# Allegro board f1c200s.brd
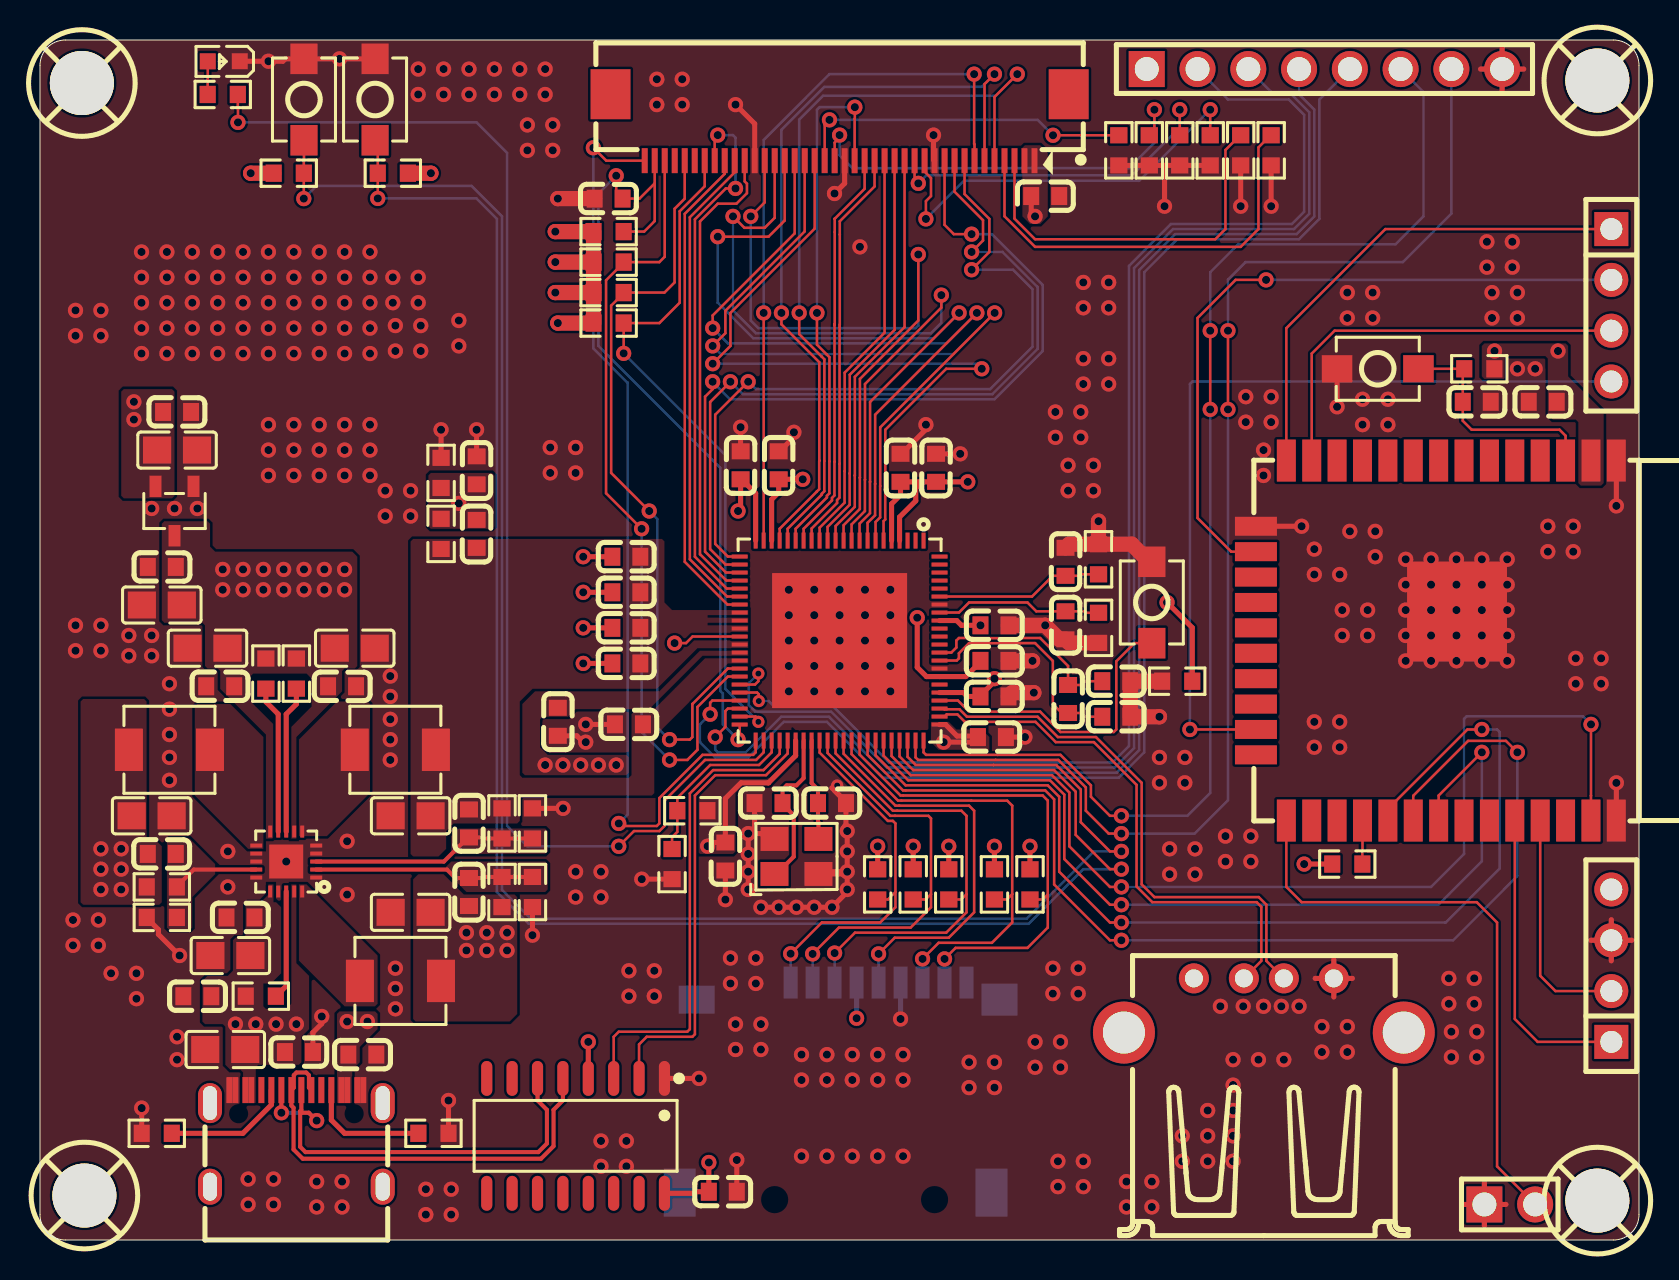
[diagram p0: board, top side]
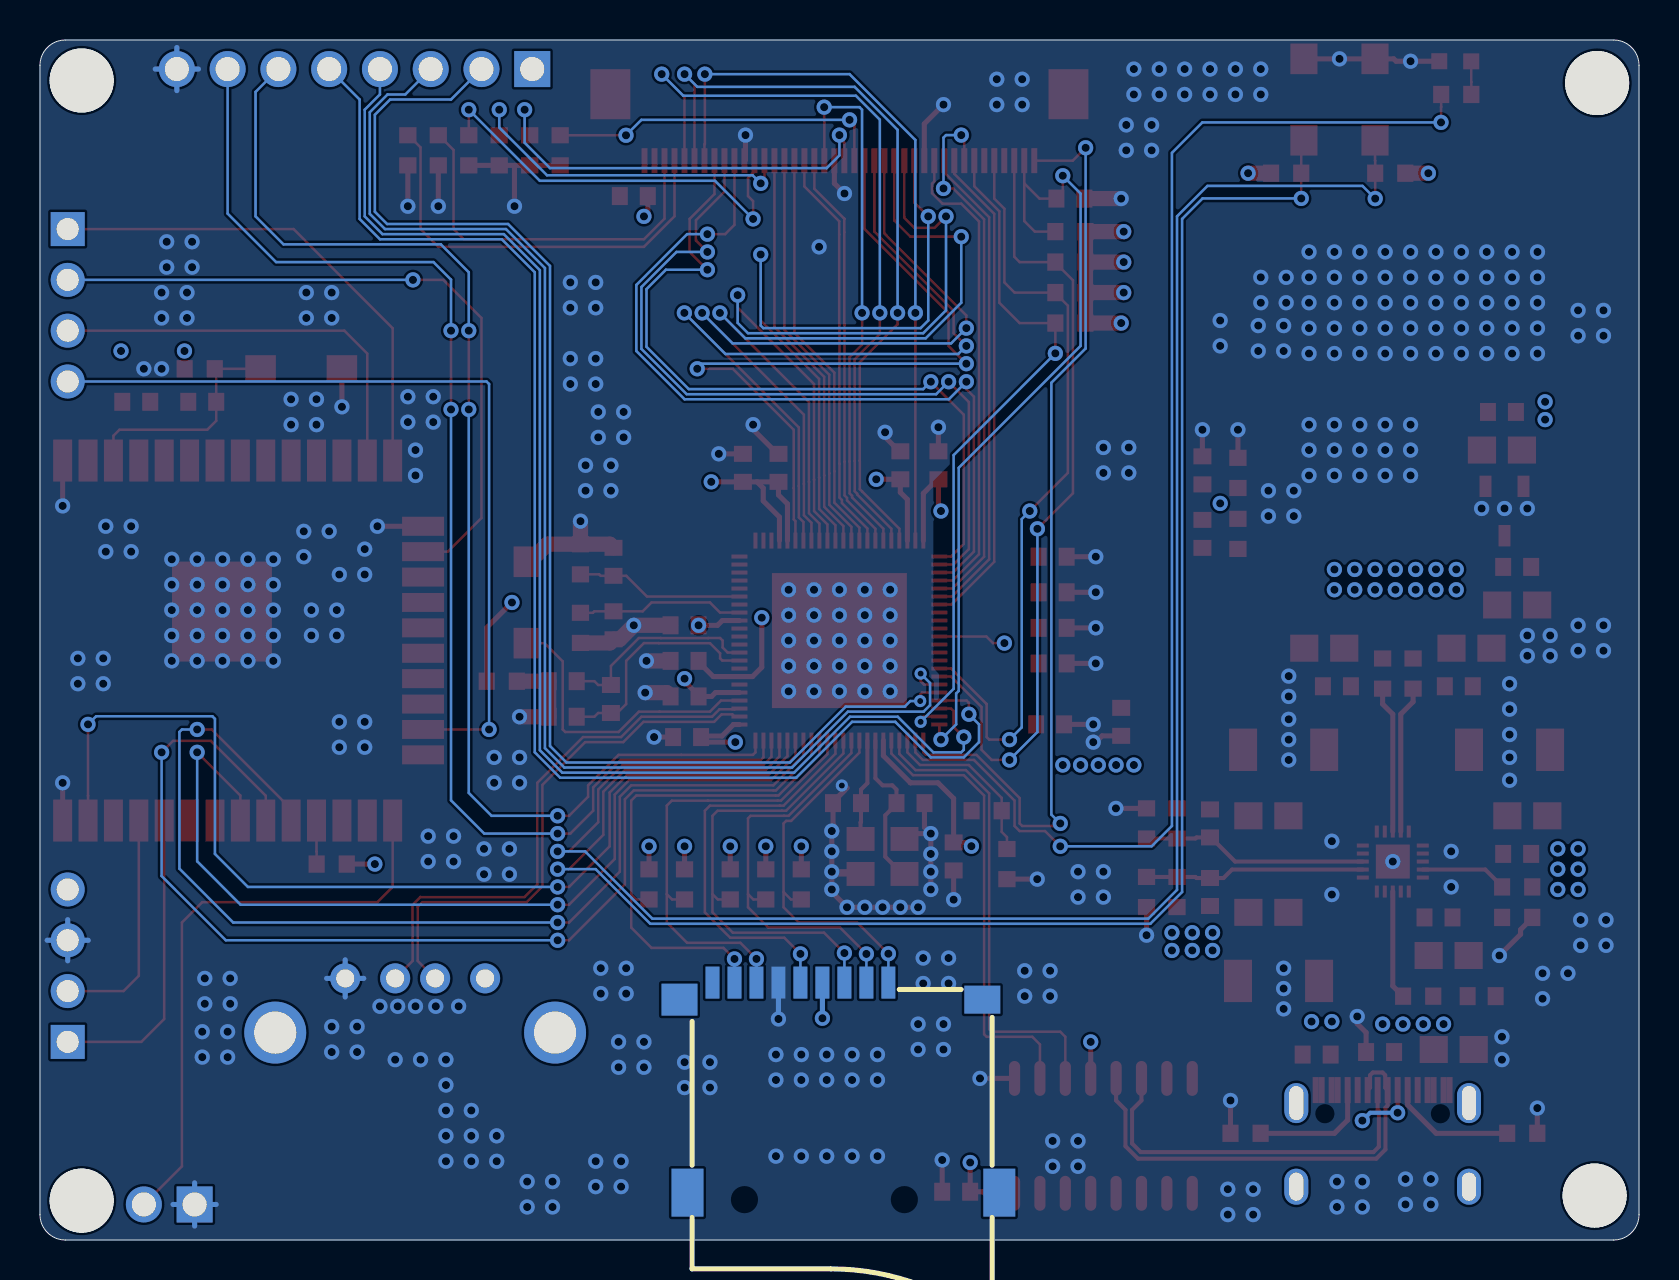
[diagram p1: board, bottom side, seen from below]

Outline 80 x 60 mm; copper layers: TOP, GND, POWER, BOTTOM. Coordinates in mm from the lower left corner of the outline.
Outline path: 0,58.73 0,1.27 arc(0.37,0.37) 1.27,0 78.73,0 arc(79.63,0.37) 80,1.27 80,58.73 arc(79.63,59.63) 78.73,60 1.27,60 arc(0.37,59.63) 0,58.73

## Design rules (mm)
constraint set DEFAULT: min track width 0.127
net group USB: nets USB_DN USB_DP

## Placement (name value [footprint] x y rotation side)
C1  104  [C0603]  7.87 12.19 180 top
C2  104  [C0603]  12.95 9.4 0 top
C27  22uF  [C0805]  6.1 31.75 180 top
C28  104  [C0603]  6.1 33.66 180 top
C29  22uF  [C0805]  6.86 39.5 0 top
C30  104  [C0603]  6.86 41.4 0 top
C31  104  [C0603]  34.16 2.41 0 top
C32  22uF  [C0805]  8.38 29.59 0 top
C33  104  [C0603]  9.02 27.69 0 top
C34  22uF  [C0805]  15.75 29.59 180 top
C35  104  [C0603]  15.11 27.69 180 top
C36  22uF  [C0805]  9.27 9.53 0 top
C37  104  [C0603]  16.13 9.27 180 top
C38  22uF  [C0805]  9.53 14.22 180 top
C39  104  [C0603]  10.03 16.13 0 top
C40  220pF  [C0603]  6.1 19.3 0 top
C41  22uF  [C0805]  5.59 21.21 0 top
C42  22uF  [C0805]  18.54 21.21 180 top
C43  220pF  [C0603]  21.46 20.83 270 top
C44  22uF  [C0805]  18.54 16.38 180 top
C45  220pF  [C0603]  21.46 17.4 90 top
C46  104  [C0603]  44.83 38.61 90 top
C47  104  [C0603]  36.96 38.73 90 top
C48  104  [C0603]  43.05 38.61 90 top
C49  104  [C0603]  35.05 38.73 90 top
C50  104  [C0603]  25.91 25.91 270 top
C51  104  [C0603]  29.46 25.78 0 top
C52  104  [C0603]  29.34 28.83 0 top
C53  104  [C0603]  29.34 30.61 0 top
C54  104  [C0603]  29.34 32.38 0 top
C55  104  [C0603]  29.34 34.16 0 top
C56  104  [C0603]  21.84 35.31 90 top
C57  104  [C0603]  21.84 38.48 90 top
C58  104  [C0603]  47.75 30.73 0 top
C59  1uF  [C0603]  51.31 33.91 270 top
C60  1uF  [C0603]  51.31 30.73 270 top
C61  104  [C0603]  34.29 19.18 270 top
C62  18pF  [C0603]  36.45 21.84 0 top
C63  18pF  [C0603]  39.62 21.84 0 top
C64  104  [C0603]  47.62 25.15 0 top
C65  104  [C0603]  47.75 27.18 0 top
C67  104  [C0603]  75.18 41.91 180 top
C68  104  [C0603]  71.88 41.91 180 top
C69  104  [C0603]  50.29 52.2 180 top
C70  104  [C0603]  28.45 52.07 0 top
C71  104  [C0603]  47.75 28.96 0 top
C72  10uF  [C0603]  53.85 26.16 0 top
C73  10uF  [C0603]  53.85 27.94 0 top
C74  10uF  [C0603]  51.44 27.05 270 top
D1  LED  [LED0603]  9.14 58.93 180 top
J1  4 HEADER  [TH_4P]  78.61 13.72 90 top
J2  B2S  [TH_2P]  73.53 1.78 270 top
J3  4 HEADER  [TH_4P]  78.61 46.74 270 top
J4  HEADER 40  [FPCSMD40P]  40.01 55.63 0 top
J5  8 HEADER  [TH_8P]  64.26 58.55 0 top
KEY1  KEY  [KEY_SMD_3X4X2]  16.76 57.02 270 top
KEY2  KEY  [KEY_SMD_3X4X2]  13.21 57.02 270 top
L1  2.2uH  [L0420]  6.48 24.51 180 top
L2  2.2uH  [L0420]  17.78 24.51 0 top
L3  2.2uH  [L0420]  18.03 12.95 0 top
M1  M  [M3]  2.16 57.78 0 top
M2  M  [M3]  2.29 2.16 0 top
M3  M  [M3]  77.98 1.91 0 top
M4  M  [M3]  77.98 57.91 0 top
R1  5.1k  [R0603]  19.68 5.33 180 top
R2  5.1k  [R0603]  5.84 5.33 0 top
R3  100k  [R0603]  12.83 28.32 90 top
R4  68k  [R0603]  6.1 17.65 180 top
R5  15k  [R0603]  6.1 16.13 180 top
R6  150K  [R0603]  23.11 20.83 90 top
R7  100k  [R0603]  24.64 20.83 90 top
R8  100k  [R0603]  23.11 17.4 270 top
R9  100k  [R0603]  24.64 17.4 270 top
R10  10k  [R0603]  55.5 54.48 90 top
R11  2k  [R0603]  20.07 35.31 270 top
R12  2k  [R0603]  20.07 38.35 270 top
R13  200k  [R0603]  52.96 34.04 90 top
R14  200k  [R0603]  52.96 30.61 90 top
R15  47k  [R0603]  56.9 27.94 180 top
R16  10k  [R0603]  72.01 43.56 180 top
R17  10k  [R0603]  65.41 18.8 0 top
R18  10k  [R0603]  28.45 45.85 0 top
R19  10k  [R0603]  28.45 50.42 180 top
R20  10k  [R0603]  28.45 48.9 180 top
R21  10k  [R0603]  28.45 47.37 180 top
R22  10k  [R0603]  41.91 17.78 270 top
R23  10k  [R0603]  43.69 17.78 270 top
R24  10k  [R0603]  45.47 17.78 270 top
R25  10k  [R0603]  47.75 17.78 270 top
R26  10k  [R0603]  49.53 17.78 270 top
R29  10k  [R0603]  17.65 53.34 0 top
R30  10k  [R0603]  12.45 53.34 180 top
R31  10k  [R0603]  9.14 57.28 0 top
R32  100k  [R0603]  11.3 28.32 90 top
R33  100k  [R0603]  11.05 12.19 180 top
R34  10k  [R0603]  53.98 54.48 90 top
R35  10k  [R0603]  58.55 54.48 90 top
R36  10k  [R0603]  57.02 54.48 90 top
R37  10k  [R0603]  60.07 54.48 90 top
R38  10k  [R0603]  61.59 54.48 90 top
R39  47k  [R0603]  32.64 21.46 180 top
R40  47k  [R0603]  31.62 18.8 90 top
RES  KEY  [KEY_SMD_3X4X2]  55.63 31.88 90 top
U4  XC6206  [SOT-23]  6.73 36.45 90 top
U5  CH340C  [SOP-16]  26.8 5.21 180 top
U6  F1C200S  [QFN-88]  40.01 29.97 180 top
U7  EA3036  [WQFN-20-EP]  12.32 18.92 180 top
U9  ESP32-WROOM-32E  [ESP32-WROOM]  69.85 29.97 180 top
U10  MiniSD  [MINISD]  40.01 7.62 270 bottom
U11  Type_C_16P  [USBSMDC]  12.7 5.08 0 top
USB2  Type_A_4P  [USBTHA]  61.21 7.62 0 top
WIFI EN  KEY  [KEY_SMD_3X4X2]  66.93 43.56 0 top
Y2  24MHZ  [SMD3225]  37.85 19.18 0 top

## Library data of the parts
C1 C2 C27-C65 C67-C74 = CAP NP: Tolerance: .TOL; User Part Number: .PARTNO
D1 = LED: Tolerance: .TOL; User Part Number: .PARTNO
J1 J3 = 4 HEADER: Tolerance: .TOL; User Part Number: .PARTNO
J2 = B2S: Tolerance: .TOL; User Part Number: .PARTNO
J4 = HEADER 40_0: Tolerance: .TOL; User Part Number: .PARTNO
J5 = 8 HEADER: Tolerance: .TOL; User Part Number: .PARTNO
KEY1 KEY2 RES WIFI EN = SW KEY-SPST: Tolerance: .TOL; User Part Number: .PARTNO
L1-L3 = INDUCTOR: Tolerance: .TOL; User Part Number: .PARTNO
M1-M4 = M: Tolerance: .TOL; User Part Number: .PARTNO
R1-R26 R29-R40 = R: Tolerance: .TOL; User Part Number: .PARTNO
U4 = XC6206: Tolerance: .TOL; User Part Number: .PARTNO
U5 = CH340C: Tolerance: .TOL; User Part Number: .PARTNO
U6 = F1C200S: Tolerance: .TOL; User Part Number: .PARTNO
U7 = EA3036: Tolerance: .TOL; User Part Number: .PARTNO
U9 = ESP32-WROOM-32E: Tolerance: .TOL; User Part Number: .PARTNO
U10 = MiniSD: Tolerance: .TOL; User Part Number: .PARTNO
U11 = Type_C_16P: Tolerance: .TOL; User Part Number: .PARTNO
USB2 = Type_A_4P: Tolerance: .TOL; User Part Number: .PARTNO
Y2 = CRYSTAL1-4/SM_0: Tolerance: .TOL; User Part Number: .PARTNO

## Footprints (pads in the part's own frame, mm; a bottom-side part is the same pattern mirrored in y, then rotated)
C0603
  rect 0.8x0.899 smd: 1(-0.7,0) 2(0.7,0)
C0805
  rect 1.41x1.351 smd: 1(-1,0) 2(1,0)
ESP32-WROOM
  rect 0.95x2.101 smd: 1(-9.015,-9) 2(-7.745,-9) 3(-6.475,-9) 4(-5.205,-9) 5(-3.935,-9) 6(-2.665,-9) 7(-1.395,-9) 8(-0.125,-9) 9(1.145,-9) 10(2.415,-9) 11(3.685,-9) 12(4.955,-9) 13(6.225,-9) 14(7.495,-9) 25(7.495,9) 26(6.225,9) 27(4.955,9) 28(3.685,9) 29(2.415,9) 30(1.145,9) 31(-0.125,9) 32(-1.395,9) 33(-2.665,9) 34(-3.935,9) 35(-5.205,9) 36(-6.475,9) 37(-7.745,9) 38(-9.015,9)
  rect 2.101x0.95 smd: 15(9.015,-5.715) 16(9.015,-4.445) 17(9.015,-3.175) 18(9.015,-1.905) 19(9.015,-0.635) 20(9.015,0.635) 21(9.015,1.905) 22(9.015,3.175) 23(9.015,4.445) 24(9.015,5.715)
  rect 4.999x4.999 smd: 39(-1.045,-1.45)
FPCSMD40P
  rect 0.3x1.25 smd: 1(9.75,-1.662) 2(9.25,-1.662) 3(8.75,-1.662) 4(8.25,-1.662) 5(7.751,-1.662) 6(7.251,-1.662) 7(6.751,-1.662) 8(6.251,-1.662) 9(5.751,-1.662) 10(5.251,-1.662) 11(4.751,-1.663) 12(4.251,-1.662) 13(3.751,-1.662) 14(3.251,-1.663) 15(2.751,-1.663) 16(2.251,-1.662) 17(1.752,-1.662) 18(1.252,-1.662) 19(0.752,-1.662) 20(0.252,-1.662) 21(-0.248,-1.662) 22(-0.748,-1.659) 23(-1.248,-1.659) 24(-1.748,-1.659) 25(-2.248,-1.66) 26(-2.748,-1.66) 27(-3.248,-1.659) 28(-3.748,-1.659) 29(-4.248,-1.659) 30(-4.748,-1.659) 31(-5.249,-1.659) 32(-5.749,-1.659) 33(-6.249,-1.659) 34(-6.749,-1.659) 35(-7.249,-1.659) 36(-7.749,-1.659) 37(-8.249,-1.659) 38(-8.75,-1.659) 39(-9.25,-1.659) 40(-9.75,-1.659)
  rect 1.999x2.499 smd: 41(-11.46,1.663) 42(11.46,1.663)
KEY_SMD_3X4X2
  rect 1.529x1.359 smd: 1(-2.035,0) 2(2.035,0)
L0420
  rect 1.4x2.12 smd: 1(2.028,0) 2(-2.028,0)
LED0603
  rect 0.8x0.8 smd: 1(-0.851,-0.01) 2(0.749,-0.005)
M3
  round 3.2 hole 3.2: 1(-0.064,0.064)
MINISD
  rect 1.6x0.701 smd: 1(-5.251,2.45) 2(-5.251,1.35) 3(-5.251,0.25) 4(-5.251,-0.85) 5(-5.251,-1.95) 6(-5.251,-3.05) 7(-5.251,-4.15) 8(-5.251,-5.25) 9(-5.251,-6.35)
  rect 1.6x1.801 smd: 10(-4.399,-8)
  rect 2.4x1.6 smd: 11(5.251,-7.6) 12(5.251,8)
  rect 1.399x1.801 smd: 13(-4.398,7.15)
QFN-88
  rect 0.201x0.8 smd: 1(-4.2,-5) 2(-3.8,-5) 3(-3.4,-5) 4(-3,-5) 5(-2.6,-5) 6(-2.2,-5) 7(-1.8,-5) 8(-1.4,-5) 9(-1,-5) 10(-0.6,-5) 11(-0.2,-5) 12(0.2,-5) 13(0.6,-5) 14(1,-5) 15(1.4,-5) 16(1.8,-5) 17(2.2,-5) 18(2.6,-5) 19(3,-5) 20(3.4,-5) 21(3.8,-5) 22(4.2,-5) 45(4.2,5) 46(3.8,5) 47(3.4,5) 48(3,5) 49(2.6,5) 50(2.2,5) 51(1.8,5) 52(1.4,5) 53(1,5) 54(0.6,5) 55(0.2,5) 56(-0.2,5) 57(-0.6,5) 58(-1,5) 59(-1.4,5) 60(-1.8,5) 61(-2.2,5) 62(-2.6,5) 63(-3,5) 64(-3.4,5) 65(-3.8,5) 66(-4.2,5)
  rect 0.8x0.201 smd: 23(5,-4.2) 24(5,-3.8) 25(5,-3.4) 26(5,-3) 27(5,-2.6) 28(5,-2.2) 29(5,-1.8) 30(5,-1.4) 31(5,-1) 32(5,-0.6) 33(5,-0.2) 34(5,0.2) 35(5,0.6) 36(5,1) 37(5,1.4) 38(5,1.8) 39(5,2.2) 40(5,2.6) 41(5,3) 42(5,3.4) 43(5,3.8) 44(5,4.2) 67(-5,4.2) 68(-5,3.8) 69(-5,3.4) 70(-5,3) 71(-5,2.6) 72(-5,2.2) 73(-5,1.8) 74(-5,1.4) 75(-5,1) 76(-5,0.6) 77(-5,0.2) 78(-5,-0.2) 79(-5,-0.6) 80(-5,-1) 81(-5,-1.4) 82(-5,-1.8) 83(-5,-2.2) 84(-5,-2.6) 85(-5,-3) 86(-5,-3.4) 87(-5,-3.8) 88(-5,-4.2)
  rect 6.751x6.751 smd: 89(0,0)
R0603
  rect 0.808x0.864 smd: 1(-0.753,0) 2(0.753,0)
SMD3225
  rect 1.399x1.199 smd: 1(-1.1,-0.875) 2(1.1,-0.875) 3(1.1,0.875) 4(-1.1,0.875)
SOP-16
  oval 0.559x1.745 smd: 1(-4.445,-2.872) 2(-3.175,-2.872) 3(-1.905,-2.872) 4(-0.635,-2.872) 5(0.635,-2.872) 6(1.905,-2.872) 7(3.175,-2.872) 8(4.445,-2.872) 9(4.445,2.872) 10(3.175,2.872) 11(1.905,2.872) 12(0.635,2.872) 13(-0.635,2.872) 14(-1.905,2.872) 15(-3.175,2.872) 16(-4.445,2.872)
SOT-23
  rect 1.069x0.599 smd: 1(1.235,-0.95) 2(1.235,0.95) 3(-1.235,0)
TH_2P
  rect 1.801x1.801 hole 1.199: 1(0,-1.27)
  round 1.801 hole 1.199: 2(0,1.27)
TH_4P
  rect 1.699x1.699 hole 1.1: 1(-3.81,0)
  round 1.699 hole 1.1: 2(-1.27,0) 3(1.27,0) 4(3.81,0)
TH_8P
  rect 1.801x1.801 hole 1.199: 1(-8.89,0)
  round 1.801 hole 1.199: 2(-6.35,0) 3(-3.81,0) 4(-1.27,0) 5(1.27,0) 6(3.81,0) 7(6.35,0) 8(8.89,0)
USBSMDC
  oval 1.199x1.999 hole 0.701x1.699: 1(-4.193,1.765) 2(4.447,1.765)
  oval 1.199x1.801 hole 0.701x1.399: 3(-4.193,-2.415) 4(4.447,-2.415)
  rect 0.3x1.301 smd: A1(-3.223,2.415) A4(-2.423,2.415) A5(-1.123,2.415) A6(-0.123,2.415) A7(0.377,2.415) A8(1.377,2.415) A9(2.677,2.415) A12(3.477,2.415) B1(3.177,2.415) B4(2.377,2.415) B5(1.877,2.415) B6(0.877,2.415) B7(-0.623,2.415) B8(-1.623,2.415) B9(-2.123,2.415) B12(-2.923,2.415)
USBTHA
  round 1.501 hole 0.899: 1(-3.484,5.461) 2(-0.984,5.461) 3(1.016,5.461) 4(3.516,5.461)
  round 3.099 hole 2.101: SH1(7.016,2.751) SH2(-6.984,2.751)
WQFN-20-EP
  rect 0.599x0.201 smd: 1(-1.5,0.8) 2(-1.5,0.4) 3(-1.5,0) 4(-1.5,-0.4) 5(-1.5,-0.8) 11(1.5,-0.8) 12(1.5,-0.4) 13(1.5,0) 14(1.5,0.4) 15(1.5,0.8)
  rect 0.201x0.599 smd: 6(-0.8,-1.5) 7(-0.4,-1.5) 8(0,-1.5) 9(0.4,-1.5) 10(0.8,-1.5) 16(0.8,1.5) 17(0.4,1.5) 18(0,1.5) 19(-0.4,1.5) 20(-0.8,1.5)
  rect 1.699x1.699 smd: 21(0,0)

## Nets
GND: C1.2 C2.2 C27.2 C28.2 C29.2 C30.2 C31.2 C32.1 C33.1 C34.1 C35.1 C36.1 C37.1 C38.2 C39.1 C41.2 C42.2 C44.2 C46.2 C47.2 C48.2 C49.2 C50.2 C51.1 C52.1 C53.1 C54.1 C55.1 C57.2 C58.2 C59.1 C60.2 C61.2 C62.1 C63.2 C64.2 C65.2 C67.2 C68.1 C69.1 C70.1 C71.2 C72.2 C73.2 D1.1(CATHODE) J1.3 J2.1 J4.11 J4.20 J4.29 J5.8 KEY1.1 KEY2.1 R1.1 R2.1 R5.2 R7.2 R9.2 R10.1 R12.1 R13.2 R14.1 R15.2 R34.1 R35.1 R36.1 R37.1 R38.1 R40.1 RES.2 U4.1(VSS) U5.1 U6.74 U6.82 U6.89 U7.1 U7.4 U7.5 U7.12 U7.13 U7.15 U7.17 U7.21 U9.1 U9.15 U9.38 U9.39 U10.6 U11.A1 U11.A12 U11.B1 U11.B12 USB2.4 WIFI EN.1 Y2.2 Y2.4
VBUS: C1.1 C2.1 C27.1 C28.1 C32.2 C33.2 C34.2 C35.2 C36.2 C37.2 C38.1 C39.2 C69.2 J4.1 J4.2 R3.2 R32.2 R33.2 U4.3 U7.7 U7.10 U7.16 U7.19(VIN3) U11.A4 U11.A9 U11.B4 U11.B9(VBUS4) USB2.1(VCC)
VCC_1V2: C44.1 C45.1 C49.1 C50.1 C65.1 L3.1 R8.2 U6.22 U6.35 U6.71
VCC_2V5: C42.1 C43.1 C51.2 C52.2 C53.2 C54.2 C55.2 C56.1 L2.1 R6.2 R11.2 U6.30 U6.31 U6.32 U6.34 U6.36
VCC_2V8: C29.1 C30.1 C58.1 U4.2 U6.80
VCC_3V3: C31.1 C40.1 C41.1 C46.1 C47.1 C48.1 C61.1 C64.1 C67.1 C71.1 J1.4 J5.1 L1.1 R4.2 R15.1 R16.1 R17.1 R18.1 R19.2 R20.2 R21.2 R22.1 R23.1 R24.1 R25.1 R26.1 R29.2 R30.2 R39.1 U5.4 U5.16(VCC) U6.4 U6.5 U6.20 U6.50 U6.67 U6.73 U9.2 U10.4(VCC)
CT_INT: C70.2 J4.39 R19.1 U6.44
CT_SCL: J4.38 R20.1 U6.38
CT_SDA: J4.36 R21.1 U6.37
DEBUG_LED: R31.2 U6.46
KEY1: KEY1.2 R29.1 U6.63
KEY2: KEY2.2 R30.1 U6.64
LCD_BL: J4.34 R18.2 U6.43
LCD_CLK: J4.30 U6.26
LCD_D0: J4.21 R10.2
LCD_D1: J4.22 R34.2
LCD_D2: J4.23 U6.6
LCD_D3: J4.24 U6.7
LCD_D4: J4.25 U6.8
LCD_D5: J4.26 U6.9
LCD_D6: J4.27 U6.10
LCD_D7: J4.28 U6.11
LCD_D8: J4.12 R35.2
LCD_D9: J4.13 R36.2
LCD_D10: J4.14 U6.12
LCD_D11: J4.15 U6.13
LCD_D12: J4.16 U6.14
LCD_D13: J4.17 U6.15
LCD_D14: J4.18 U6.16
LCD_D15: J4.19 U6.17
LCD_D16: J4.3 R37.2
LCD_D17: J4.4 R38.2
LCD_D18: J4.5 U6.18
LCD_D19: J4.6 U6.19
LCD_D20: J4.7 U6.21
LCD_D21: J4.8 U6.23
LCD_D22: J4.9 U6.24
LCD_D23: J4.10 U6.25
LCD_DE: J4.33 U6.27
LCD_HSYNC: J4.31 U6.28
LCD_REST: J4.40 U6.45
LCD_VSYNC: J4.32 U6.29
SDIO_CLK: U6.56 U10.5
SDIO_CMD: R24.2 U6.55 U10.3
SDIO_D0: R25.2 U6.57 U10.7
SDIO_D1: R26.2 U6.58 U10.8
SDIO_D2: R22.2 U6.53 U10.1
SDIO_D3: R23.2 U6.54 U10.2
SOC_USB_DM: U6.68 USB2.2
SOC_USB_DP: U6.69 USB2.3
SPI0_CLK: U6.59 U9.30
SPI0_CS: U6.60 U9.29
SPI0_MISO: U6.61 U9.31
SPI0_MOSI: U6.62 U9.37
SPI1_CLK: J5.2 U6.40
SPI1_CS: J5.4 U6.42
SPI1_MISO: J5.3 U6.39
SPI1_MOSI: J5.5 U6.41
TCK: J3.2 U9.16
TDI: J3.1 U9.14
TDO: J3.4 U9.23
TMS: J3.3 U9.13
UART1_RX: J5.7 U6.65
UART1_TX: J5.6 U6.66
USB_DN: U5.6 U11.A7 U11.B7
USB_DP: U5.5 U11.A6 U11.B6
USB_RXD: U5.3 U6.48
USB_TXD: U5.2 U6.49
WIFI_EN: C68.2 R16.2 U9.3 WIFI EN.2
N89821: C40.2 R4.1 R5.1 U7.14
N90879: C43.2 R6.1 R7.1 U7.3
N91416: C45.2 R8.1 R9.1 U7.2
N96693: C56.2 C57.1 R11.1 R12.2 U6.33
N99176: C60.1 R14.2 U6.81
N99180: C59.2 R13.1 U6.83(VRA2)
N102537: R39.2 R40.2 U6.47
N104315: C62.2 U6.51 Y2.1
N104352: C63.1 U6.52 Y2.3(4)
N107401: J1.2 U9.35(TXD0)
N107405: J1.1 U9.34
N125505: C72.1 C74.2 U6.75
N125515: C73.1 C74.1 U6.76
N192994: R1.2 U11.B5
N192998: R2.2 U11.A5
N861690: R3.1 U7.8
N871675: L1.2 U7.11
N1057780: RES.1 U6.70
N1197170: D1.2 R31.1
N8716712: R33.1 U7.18
N8716714: L3.2 U7.20
N8716716: L2.2 U7.6
N8716719: R32.1 U7.9
N10697224: J2.2 U9.25
N10697227: R17.2 U9.28

Pads without a net: J4 35 37 41 42; M1 1; M2 1; M3 1; M4 1; U5 7 8 9 10 11 12 13 14 15; U6 1 2 3 72 77 78 79 84 85 86 87 88; U9 4 5 6 7 8 9 10 11 12 17 18 19 20 21 22 24 26 27 32 33 36; U10 9 10 11 12 13; U11 1 2 3 4 A8 B8; USB2 SH1 SH2

## Via types
v1: diameter 0.762, hole 0.406, TOP to BOTTOM, 566 vias
v2: diameter 0.61, hole 0.305, TOP to BOTTOM, 4 vias

## Routing (per net, layer and track width the routed paths; a pad name or vN(x,y) marks a point on that pad's centre or on a via; arc(x,y) is an arc through that point)
GND: length 162.1
  TOP w0.254: 63.8,13.08 USB2.4 ; USB2.4 65.66,13.08 ; USB2.4 64.73,12.15 ; USB2.4 64.73,14.01 ; 71.18,1.78 J2.1 ; J2.1 72.26,2.86 ; J2.1 72.26,0.7 ; J2.1 73.34,1.78 ; 40.32,20.77 C63.2 40.32,21.89 ; 40.32,20.77 40.26,20.7 ; 40.32,20.77 40.32,20.51 v1(40.39,20.45) v1(40.39,19.43) v1(40.39,18.41) ; C49.2 v1(35.05,40.64) ; v1(34.8,56.77) 35.76,55.81 J4.29 ; J4.11 44.7,54.02 v1(44.7,55.24) ; v1(35.43,20.32) 35.75,20.64 C62.1 ; v1(35.43,20.32) 36.48,20.32 Y2.4 ; v1(35.43,20.32) v1(35.43,19.3) v1(35.43,18.41) v1(35.43,17.53) ; C53.1 v1(27.18,30.61) ; U9.1 v1(78.87,36.7) ; R37.1 v1(60.07,51.69) ; v1(27.3,24.89) 27.18,24.89 26.86,25.21 C50.2 ; 73.15,57.47 J5.8 ; J5.8 73.15,59.63 ; J5.8 72.07,58.55 ; J5.8 74.23,58.55 ; R40.1 v1(30.11,18.04) ; 77.59,14.99 J1.3 ; J1.3 78.61,16.01 ; J1.3 79.64,14.99 ; J1.3 78.61,13.96 ; v1(39.75,52.32) 40.26,52.83 J4.20 ; C46.2 v1(46.04,39.31) ; v1(37.72,40.39) 37.72,40.15 37.01,39.44 C47.2 ; 40.32,21.89 39.74,22.47 ; 40.32,21.89 40.32,21.91 39.62,22.61 39.88,22.61 v2(39.88,22.72) ; R5.2 5.34,16.1 5.93,15.52 5.93,15.28 v1(6.99,14.22) ; v1(21.84,40.51) C57.2 21.91,39.18 ; v1(14.1,11.18) 14.1,10.82 13.65,10.37 C2.2 ; D1.1 v1(11.43,58.94) 12.15,58.94 12.27,59.06 KEY2.1 v1(14.99,59.06) KEY1.1 ; U9.15 v1(63.12,35.69) ; 56.26,53.73 R36.1 R35.1 ; 56.26,53.73 v1(56.26,51.69) ; 56.26,53.73 R10.1 R34.1 ; U5.1 v1(32.97,8.08) ; v1(40.39,18.41) v1(40.39,17.53) 40.39,17.4 v1(39.62,16.64) v1(38.73,16.64) v1(37.85,16.64) v1(36.96,16.64) v1(36.07,16.64) ; v1(40.39,18.41) 39.06,18.41 Y2.2 40.25,18.3 40.26,18.29 ; R9.2 v1(24.64,15.24) ; C61.2 v1(34.29,17.02) ; v1(44.32,40.77) 44.32,40.53 43.1,39.31 C48.2 ; v1(40.01,29.97) v1(41.27,28.7) 41.91,28.07 42.81,28.07 ; C52.1 v1(27.18,28.83) ; WIFI EN.1 v1(64.89,41.66) ; U9.38 v1(78.87,22.86) ; C55.1 v1(27.18,34.16) ; C51.1 v1(27.3,25.78) ; C31.2 v1(34.86,4) ; R7.2 v1(26.17,21.58) ; R2.1 v1(5.09,6.6) ; R12.1 v1(20.07,40.51) ; R1.1 v1(20.44,6.98) ; C54.1 v1(27.18,32.38) ; C64.2 v1(49.28,25.15) ; R38.1 v1(61.59,51.69)
  TOP w0.762: C65.2 48.64,27.37 v1(49.72,27.37) ; R13.2 54.62,34.79 55.5,33.91 RES.2 ; R13.2 v1(52.96,35.94) ; R13.2 51.49,34.79 C59.1 ; C70.1 v1(25.91,52.07) ; C58.2 v1(50.29,30.73) 50.99,30.03 C60.2 51.49,29.85 R14.1 ; C71.2 v1(49.66,28.96) ; R15.2 C73.2 C72.2 v1(56.01,26.16)
  GND w0.254: 78.61,13.96 J1.3 ; J1.3 77.59,14.99 ; J1.3 79.64,14.99 ; J1.3 78.61,16.01 ; J2.1 73.34,1.78 ; J2.1 72.26,2.86 ; J2.1 72.26,0.7 ; J2.1 71.18,1.78 ; USB2.4 64.73,14.01 ; USB2.4 64.73,12.15 ; USB2.4 63.8,13.08 ; USB2.4 65.66,13.08 ; J5.8 73.15,59.63 ; J5.8 72.07,58.55 ; J5.8 74.23,58.55 ; J5.8 73.15,57.47
  BOTTOM w0.254: J5.8 73.15,59.63 ; J5.8 73.15,57.47 ; J5.8 72.07,58.55 ; J5.8 74.23,58.55 ; 72.26,0.7 J2.1 ; J2.1 71.18,1.78 ; J2.1 72.26,2.86 ; J2.1 73.34,1.78 ; USB2.4 64.73,14.01 ; USB2.4 65.66,13.08 ; USB2.4 64.73,12.15 ; USB2.4 63.8,13.08 ; J1.3 79.64,14.99 ; J1.3 77.59,14.99 ; J1.3 78.61,16.01 ; J1.3 78.61,13.96 ; U10.6 v1(43.06,11.05)
  vias: v1(1.65,16) v1(1.65,14.73) v1(1.78,46.48) v1(1.78,45.21) v1(1.78,30.73) v1(1.78,29.46) v1(2.92,16) v1(2.92,14.73) v1(3.05,46.48) v1(3.05,45.21) v1(3.05,30.73) v1(3.05,29.46) v1(3.56,13.34) v1(4.45,30.23) v1(4.45,29.21) v1(4.83,13.34) v1(4.83,12.06) v1(5.08,49.4) v1(5.08,48.13) v1(5.08,46.86) v1(5.08,45.59) v1(5.08,44.32) v1(5.59,36.58) v1(5.59,30.23) v1(5.59,29.21) v1(6.35,49.4) v1(6.35,48.13) v1(6.35,46.86) v1(6.35,45.59) v1(6.35,44.32) v1(6.48,27.81) v1(6.48,26.54) v1(6.48,25.27) v1(6.48,24.13) v1(6.48,22.99) v1(6.73,36.58) v1(6.86,10.16) v1(6.86,9.02) v1(7.62,49.4) v1(7.62,48.13) v1(7.62,46.86) v1(7.62,45.59) v1(7.62,44.32) v1(7.87,36.58) v1(8.89,49.4) v1(8.89,48.13) v1(8.89,46.86) v1(8.89,45.59) v1(8.89,44.32) v1(9.4,19.43) v1(9.4,17.65) v1(10.16,49.4) v1(10.16,48.13) v1(10.16,46.86) v1(10.16,45.59) v1(10.16,44.32) v1(10.41,3.05) v1(10.41,1.78) v1(11.43,49.4) v1(11.43,48.13) v1(11.43,46.86) v1(11.43,45.59) v1(11.43,44.32) v1(11.43,40.77) v1(11.43,39.5) v1(11.43,38.23) v1(11.68,3.05) v1(11.68,1.78) v1(12.32,18.92) v1(12.7,49.4) v1(12.7,48.13) v1(12.7,46.86) v1(12.7,45.59) v1(12.7,44.32) v1(12.7,40.77) v1(12.7,39.5) v1(12.7,38.23) v1(13.84,2.92) v1(13.84,1.65) v1(13.97,49.4) v1(13.97,48.13) v1(13.97,46.86) v1(13.97,45.59) v1(13.97,44.32) v1(13.97,40.77) v1(13.97,39.5) v1(13.97,38.23) v1(15.11,2.92) v1(15.11,1.65) v1(15.24,49.4) v1(15.24,48.13) v1(15.24,46.86) v1(15.24,45.59) v1(15.24,44.32) v1(15.24,40.77) v1(15.24,39.5) v1(15.24,38.23) v1(15.37,19.94) v1(15.37,17.27) v1(16.51,49.4) v1(16.51,48.13) v1(16.51,46.86) v1(16.51,45.59) v1(16.51,44.32) v1(16.51,40.77) v1(16.51,39.5) v1(16.51,38.23) v1(17.27,37.47) v1(17.27,36.2) v1(17.53,28.19) v1(17.53,27.18) v1(17.53,26.04) v1(17.53,25.02) v1(17.53,24) v1(17.65,48.13) v1(17.65,46.86) v1(17.78,45.72) v1(17.78,44.45) v1(17.78,13.59) v1(17.78,12.57) v1(17.78,11.56) v1(18.54,37.47) v1(18.54,36.2) v1(18.92,58.55) v1(18.92,57.28) v1(18.92,48.13) v1(18.92,46.86) v1(19.05,45.72) v1(19.05,44.45) v1(19.3,2.54) v1(19.3,1.27) v1(20.19,58.55) v1(20.19,57.28) v1(20.57,2.54) v1(20.57,1.27) v1(20.95,45.97) v1(20.95,44.7) v1(21.46,58.55) v1(21.46,57.28) v1(22.73,58.55) v1(22.73,57.28) v1(24,58.55) v1(24,57.28) v1(24.38,55.75) v1(24.38,54.48) v1(25.27,58.55) v1(25.27,57.28) v1(25.53,39.62) v1(25.53,38.35) v1(25.65,55.75) v1(25.65,54.48) v1(26.8,39.62) v1(26.8,38.35) v1(26.8,18.41) v1(26.8,17.14) v1(28.07,18.41) v1(28.07,17.14) v1(28.07,4.95) v1(28.07,3.68) v1(29.34,4.95) v1(29.34,3.68) v1(29.46,13.46) v1(29.46,12.19) v1(30.73,13.46) v1(30.73,12.19) v1(30.86,58.04) v1(30.86,56.77) v1(32.13,58.04) v1(32.13,56.77) v1(34.54,14.1) v1(34.54,12.83) v1(34.8,10.79) v1(34.8,9.53) v1(35.81,14.1) v1(35.81,12.83) v1(36.07,10.79) v1(36.07,9.53) v1(37.47,32.51) v1(37.47,31.24) v1(37.47,29.97) v1(37.47,28.7) v1(37.47,27.43) v1(38.1,9.27) v1(38.1,8) v1(38.1,4.19) v1(38.73,32.51) v1(38.73,31.24) v1(38.73,29.97) v1(38.73,28.7) v1(38.73,27.43) v1(39.37,9.27) v1(39.37,8) v1(39.37,4.19) v1(40.01,32.51) v1(40.01,31.24) v1(40.01,28.7) v1(40.01,27.43) v1(40.64,9.27) v1(40.64,8) v1(40.64,4.19) v1(41.02,49.66) v1(41.27,32.51) v1(41.27,31.24) v1(41.27,29.97) v1(41.27,27.43) v1(41.91,9.27) v1(41.91,8) v1(41.91,4.19) v1(42.55,32.51) v1(42.55,31.24) v1(42.55,29.97) v1(42.55,28.7) v1(42.55,27.43) v1(43.18,9.27) v1(43.18,8) v1(43.18,4.19) v1(46.48,8.89) v1(46.48,7.62) v1(47.75,8.89) v1(47.75,7.62) v1(49.78,9.91) v1(49.78,8.64) v1(50.67,13.59) v1(50.67,12.32) v1(50.8,41.4) v1(50.8,40.13) v1(50.93,3.94) v1(50.93,2.67) v1(51.05,9.91) v1(51.05,8.64) v1(51.44,38.73) v1(51.44,37.47) v1(51.94,13.59) v1(51.94,12.32) v1(52.07,41.4) v1(52.07,40.13) v1(52.2,47.88) v1(52.2,46.61) v1(52.2,44.07) v1(52.2,42.8) v1(52.2,3.94) v1(52.2,2.67) v1(52.7,38.73) v1(52.7,37.47) v1(53.47,47.88) v1(53.47,46.61) v1(53.47,44.07) v1(53.47,42.8) v1(54.36,2.92) v1(54.36,1.65) v1(55.63,2.92) v1(55.63,1.65) v1(56.01,24.13) v1(56.01,22.86) v1(56.52,19.56) v1(56.52,18.29) v1(57.15,5.21) v1(57.15,3.94) v1(57.28,24.13) v1(57.28,22.86) v1(57.78,19.56) v1(57.78,18.29) v1(58.42,6.48) v1(58.42,5.21) v1(58.42,3.94) v1(59.05,11.68) v1(59.31,20.19) v1(59.31,18.92) v1(59.69,9.02) v1(59.69,7.75) v1(59.69,6.48) v1(59.69,5.21) v1(59.69,3.94) v1(60.2,11.68) v1(60.33,42.16) v1(60.33,40.89) v1(60.58,20.19) v1(60.58,18.92) v1(60.96,9.02) v1(61.21,39.5) v1(61.21,38.23) v1(61.21,11.68) v1(61.59,42.16) v1(61.59,40.89) v1(62.1,11.68) v1(62.23,9.02) v1(62.99,11.68) v1(63.75,34.54) v1(63.75,33.27) v1(63.75,25.91) v1(63.75,24.64) v1(64.14,10.67) v1(64.14,9.4) v1(65.02,33.27) v1(65.02,25.91) v1(65.02,24.64) v1(65.15,31.5) v1(65.15,30.23) v1(65.41,47.37) v1(65.41,46.1) v1(65.41,10.67) v1(65.41,9.4) v1(65.53,35.43) v1(66.17,42.04) v1(66.17,40.77) v1(66.42,31.5) v1(66.42,30.23) v1(66.67,47.37) v1(66.67,46.1) v1(66.8,35.43) v1(66.8,34.16) v1(67.44,42.04) v1(67.44,40.77) v1(68.33,34.04) v1(68.33,32.77) v1(68.33,31.5) v1(68.33,30.23) v1(68.33,28.96) v1(69.6,34.04) v1(69.6,32.77) v1(69.6,31.5) v1(69.6,30.23) v1(69.6,28.96) v1(70.48,13.08) v1(70.48,11.81) v1(70.61,10.41) v1(70.61,9.14) v1(70.87,34.04) v1(70.87,32.77) v1(70.87,31.5) v1(70.87,30.23) v1(70.87,28.96) v1(71.75,13.08) v1(71.75,11.81) v1(71.88,10.41) v1(71.88,9.14) v1(72.14,34.04) v1(72.14,32.77) v1(72.14,31.5) v1(72.14,30.23) v1(72.14,28.96) v1(72.39,49.91) v1(72.39,48.64) v1(72.64,47.37) v1(72.64,46.1) v1(73.41,34.04) v1(73.41,32.77) v1(73.41,31.5) v1(73.41,30.23) v1(73.41,28.96) v1(73.66,49.91) v1(73.66,48.64) v1(73.91,47.37) v1(73.91,46.1) v1(73.91,43.56) v1(74.8,43.56) v1(75.44,35.69) v1(75.44,34.42) v1(76.71,35.69) v1(76.71,34.42) v1(76.83,29.08) v1(76.83,27.81) v1(78.11,29.08) v1(78.11,27.81)
VBUS: length 120.3
  TOP w0.254: v1(49.78,51.18) 49.59,51.37 C69.2
  POWER w0.762: v1(49.78,51.18) 46.99,53.98 35.29,53.98 34.79,53.47 34.43,53.47 33.91,52.95 33.91,52.59 28,46.68 28,44.38 27.05,43.43 3.81,43.43 3.05,42.67 3.05,33.27 3.81,32.51 v1(9.14,32.51) ; USB2.1 57.73,8.07 55.63,5.97 22.7,5.97 19.15,9.53 17.78,9.53 v1(16.38,10.92)
  vias: v1(9.14,33.53) v1(9.78,10.79) v1(10.16,33.53) v1(10.16,32.51) v1(10.79,10.79) v1(11.18,33.53) v1(11.18,32.51) v1(11.81,10.79) v1(12.19,33.53) v1(12.19,32.51) v1(12.83,10.79) v1(13.21,33.53) v1(13.21,32.51) v1(14.22,33.53) v1(14.22,32.51) v1(15.24,33.53) v1(15.24,32.51) v1(15.37,10.92)
VCC_1V2: length 8.3
  TOP w0.254: v1(34.92,36.45) 35.05,36.58 C49.1 35.1,38.03 35.81,37.33 U6.22 ; v1(47.75,28.07) 47.75,27.93 47.05,27.23 C65.1 46.4,27.18 46.2,27.37 U6.71
  vias: v1(21.34,15.37) v1(21.34,14.48) v1(22.35,15.37) v1(22.35,14.48) v1(23.37,15.37) v1(23.37,14.48) v1(25.27,23.75) v1(26.16,23.75) v1(27.05,23.75) v1(27.94,23.75) v1(28.83,23.75)
VCC_2V8: length 57.4
  TOP w0.254: v1(47.05,30.73) 46.1,30.73 45.86,30.97 U6.80
  POWER w0.762: v1(47.05,30.73) 48.39,30.73 49.15,31.5 49.15,38.48 45.72,41.91 v1(4.7,41.91)
  vias: v1(4.7,41.02)
VCC_3V3: length 73.1
  TOP w0.254: U6.5 42.6,36.81 43.05,37.25 C48.1 44.13,37.91 ; U6.67 45.3,25.77 45.88,25.2 46.8,25.2 47.05,24.94 47.05,24.89 46.67,24.89 ; C71.1 47.05,28.91 46.32,28.17 U6.73 44.35,28.17 43.89,28.63 v1(43.89,31.11) ; R17.1 v1(63.25,18.8) ; 46.67,24.89 C64.1 ; 46.67,24.89 v1(45.21,24.89) ; U5.4 v1(27.43,9.91) ; U5.16 32.73,2.33 32.81,2.41 C31.1 v1(33.46,3.88) ; R24.1 v1(45.47,19.68) ; R26.1 v1(49.53,19.68) ; 44.13,37.91 43.81,37.6 43.81,36.96 43,36.15 U6.4 ; 44.13,37.91 C46.1 v1(46.42,37.91) ; R23.1 v1(43.69,19.68) ; U6.50 37.81,24.22 36.46,22.87 36.45,22.86 36.44,22.86 35.07,22.86 34.29,22.08 C61.1 33.59,19.88 v1(33.4,19.69) ; v1(38.16,38.03) C47.1 36.96,37.38 36.6,37.03 U6.20 ; R15.1 57.65,30.62 v1(56.39,31.88) ; R22.1 v1(41.91,19.68) ; R25.1 v1(47.75,19.68)
  TOP w0.762: R21.2 R18.1 v1(25.91,45.85) ; R21.2 R20.2 ; R21.2 v1(25.78,47.37) ; v1(25.78,50.42) R19.2 R20.2 ; R20.2 v1(25.78,48.9) ; R29.2 v1(19.56,53.34) ; R30.2 v1(10.54,53.34)
  POWER w0.254: 78.61,16.5 J1.4 ; J1.4 77.59,17.53 ; J1.4 78.61,18.55 ; 54.29,58.55 J5.1 ; J5.1 55.37,57.47 ; J5.1 56.45,58.55
  BOTTOM w0.254: U10.4 v1(40.86,11.09)
  vias: v1(3.05,19.56) v1(3.05,18.54) v1(3.05,17.53) v1(4.06,19.56) v1(4.06,18.54) v1(4.06,17.53) v1(72.77,44.45) v1(75.95,44.45)
CT_INT: length 40.2
  TOP w0.127: v1(34.92,25.02) 35.01,25.1 U6.44 ; 30.76,52.83 J4.39 ; 30.76,52.83 29.99,52.07 C70.2 28.83,52.39 v1(28.83,53.21) ; 30.76,52.83 30.76,50.95 30.23,50.42 R19.1
  BOTTOM w0.127: v1(34.92,25.02) 34.16,25.78 34.16,27.33 34.04,27.45 34.04,38.61 27.94,44.7 27.94,52.32 v1(28.83,53.21)
CT_SCL: length 40
  TOP w0.127: U6.38 34.41,28.17 32.89,26.65 32.89,24.51 32.38,24 v1(31.5,24) ; v1(30.1,35.56) 28.32,37.34 28.32,47.99 29.2,48.87 R20.1 30.99,48.9 31.26,49.16 J4.38
  BOTTOM w0.127: v1(31.5,24) 30.1,25.4 v1(30.1,35.56)
CT_SDA: length 38.8
  TOP w0.127: U6.37 34.41,28.57 34.41,28.56 34.27,28.43 32.65,26.81 32.64,26.79 32.64,25.15 32.51,25.02 v1(31.5,25.02) ; J4.36 32.26,52.07 31.75,51.56 31.75,47.88 31.24,47.37 R21.1 29.2,47.34 28.57,46.72 28.57,38.35 v1(30.48,36.45)
  BOTTOM w0.127: v1(31.5,25.02) 30.88,25.63 30.88,36.04 v1(30.48,36.45)
DEBUG_LED: length 65.7
  TOP w0.127: R31.2 9.9,56.65 9.91,56.65 v1(9.91,55.88) ; U6.46 36.2,24.38 35.83,24 33.27,24 31.24,21.97 31.24,20.7 30.99,20.45 29.72,20.45 v1(28.96,19.68)
  BOTTOM w0.127: v1(28.96,19.68) 24.38,19.68 23.37,20.7 23.37,54.36 21.84,55.88 v1(9.91,55.88)
KEY1: length 91.5
  TOP w0.127: v1(16.9,52.08) R29.1 16.9,54.85 KEY1.2 ; U6.63 43,24.18 43.69,23.5 50.74,23.5 51.82,22.42 51.82,20.26 53.53,18.54 v1(54.1,18.54)
  BOTTOM w0.127: v1(54.1,18.54) 52.2,18.54 49.47,15.81 24.45,15.81 22.86,17.4 22.86,51.05 21.84,52.08 v1(16.9,52.08)
KEY2: length 94.8
  TOP w0.127: v1(13.2,52.07) R30.1 13.2,53.96 13.21,53.97 KEY2.2 ; v1(54.1,19.43) 53.53,19.43 52.07,20.89 52.07,22.52 50.84,23.75 47.7,23.75 47.7,23.75 43.81,23.75 43.41,24.16 U6.64
  BOTTOM w0.127: v1(54.1,19.43) 52.73,19.43 49.36,16.07 24.55,16.07 23.11,17.5 23.11,51.18 21.59,52.7 13.83,52.7 v1(13.2,52.07)
LCD_BL: length 34.7
  TOP w0.127: v2(35.94,25.91) 35.94,26.04 35.8,26.17 U6.43 ; J4.34 33.26,52.69 32,51.43 32,46.86 30.99,45.85 R18.2 v1(29.2,44.33)
  BOTTOM w0.127: v2(35.94,25.91) 34.29,27.56 34.29,39.24 v1(29.2,44.33)
LCD_CLK: length 23.8
  TOP w0.127: J4.30 35.26,52.93 35.37,52.81 35.37,52.34 34.84,51.82 33.91,51.82 33.02,50.93 33.02,34.29 34.34,32.97 U6.26
LCD_D0: length 22
  TOP w0.127: v1(40.01,55.24) 40.01,55.12 39.76,54.87 J4.21 ; R10.2 55.75,55.49 v1(55.75,56.52)
  BOTTOM w0.127: v1(55.75,56.52) 55.75,54.86 54.48,53.59 40.64,53.59 40.01,54.23 v1(40.01,55.24)
LCD_D1: length 16.9
  TOP w0.127: v1(39.5,56.01) 39.26,55.77 J4.22 ; R34.2 v1(50.68,55.24)
  BOTTOM w0.127: v1(39.5,56.01) 49.91,56.01 v1(50.68,55.24)
LCD_D2: length 37.6
  TOP w0.127: U6.6 42.2,35.94 42.29,36.03 42.29,37.59 42.29,37.59 42.29,40.51 45.34,43.56 v1(47.12,43.56) ; J4.23 38.76,50.57 34.54,46.36 34.54,44.7 v1(33.66,43.81)
  BOTTOM w0.127: v1(33.66,43.81) 46.99,43.81 47.12,43.69 v1(47.12,43.56)
LCD_D3: length 40.1
  TOP w0.127: U6.7 41.81,35.9 42.03,36.13 42.03,37.7 42.04,37.7 42.04,40.63 v1(47.76,46.35) ; J4.24 38.26,50.43 34.29,46.46 34.29,45.34 v1(33.66,44.7)
  BOTTOM w0.127: v1(33.66,44.7) 34.06,44.3 45.71,44.3 v1(47.76,46.35)
LCD_D4: length 37.9
  TOP w0.127: v1(46.87,46.35) 41.78,41.27 41.78,37.81 41.78,37.8 41.78,36.24 41.41,35.86 U6.8 ; J4.25 37.76,50.33 33.66,46.23 v1(33.66,45.59)
  BOTTOM w0.127: v1(46.87,46.35) 45.35,44.83 34.42,44.83 v1(33.66,45.59)
LCD_D5: length 36.8
  TOP w0.127: v1(33.91,50.16) 36.45,50.16 37.26,50.97 J4.26 ; v1(45.98,46.35) 41.53,41.9 41.53,37.91 41.53,37.91 41.53,36.34 41,35.82 U6.9
  BOTTOM w0.127: v1(45.98,46.35) 44.71,45.09 35.69,45.09 33.91,46.86 v1(33.91,50.16)
LCD_D6: length 36.7
  TOP w0.127: J4.27 36.76,51.11 36.26,50.61 35.24,50.61 v1(34.67,51.18) ; U6.10 40.6,35.78 41.27,36.45 41.27,38.01 41.27,38.02 41.27,42.8 45.09,46.62 v1(45.09,47.24)
  BOTTOM w0.127: v1(34.67,51.18) 34.67,46.48 35.81,45.34 44.58,45.34 45.09,45.86 v1(45.09,47.24)
LCD_D7: length 36.3
  TOP w0.127: v1(35.56,51.18) 36.26,51.88 J4.28 ; v1(43.94,49.28) 43.94,45.97 41.02,43.05 41.02,38.12 41.02,38.12 41.02,36.55 40.2,35.74 U6.11
  BOTTOM w0.127: v1(43.94,49.28) 43.94,45.72 43.81,45.59 35.94,45.59 35.56,45.97 v1(35.56,51.18)
LCD_D8: length 20.9
  TOP w0.127: v1(44.32,51.05) 44.32,51.94 44.58,52.2 44.58,53.1 44.26,53.42 J4.12 ; R35.2 v1(58.55,56.52)
  BOTTOM w0.127: v1(58.55,56.52) 54.99,52.96 46.23,52.96 v1(44.32,51.05)
LCD_D9: length 17.6
  TOP w0.127: J4.13 43.76,53.02 v1(43.94,52.83) ; R36.2 v1(57.02,56.52)
  BOTTOM w0.127: v1(57.02,56.52) 57.02,55.63 54.63,53.24 44.35,53.24 v1(43.94,52.83)
LCD_D10: length 20.4
  TOP w0.127: U6.12 39.81,35.7 40.76,36.66 40.76,38.22 40.77,38.23 40.77,43.16 43.26,45.65 J4.14
LCD_D11: length 20.4
  TOP w0.127: J4.15 42.76,45.51 40.51,43.26 40.51,38.33 40.51,38.33 40.51,36.76 39.41,35.66 U6.13
LCD_D12: length 20.3
  TOP w0.127: U6.14 39.01,35.62 40.26,36.87 40.26,38.43 40.26,38.44 40.26,43.37 42.26,45.37 J4.16
LCD_D13: length 20.3
  TOP w0.127: J4.17 41.76,52.68 40.01,50.94 40.01,50.28 40.01,45.78 40.01,45.74 40.01,45.63 40,38.81 40,38.81 40,37.12 39.88,37 39.88,36.85 38.6,35.58 U6.15
LCD_D14: length 20.3
  TOP w0.127: U6.16 38.2,35.56 39.62,36.98 39.62,37.1 39.75,37.23 39.75,38.9 39.75,38.92 39.75,45.76 39.75,45.78 39.76,45.81 39.76,50.39 39.76,51.05 39.76,51.06 39.77,51.07 41.26,52.56 J4.18
LCD_D15: length 27.1
  TOP w0.127: J4.19 40.76,56.06 40.77,56.07 v1(40.77,56.64) ; U6.17 37.81,35.56 39.37,37.13 39.37,37.21 39.49,37.33 39.49,38.92 39.5,38.94 39.5,44.14 39.37,44.27 38.87,44.77 v1(38.87,46.35)
  BOTTOM w0.127: v1(40.77,56.64) 39,56.64 38.87,56.52 v1(38.87,46.35)
LCD_D16: length 19.1
  TOP w0.127: J4.3 48.76,51.07 49.78,50.04 58.8,50.04 59.31,50.55 59.31,54.5 60.04,55.24 R37.2
LCD_D17: length 21.5
  TOP w0.127: R38.2 61.57,55.24 60.96,54.63 60.96,50.55 60.07,49.66 49.78,49.66 48.26,51.19 J4.4
LCD_D18: length 39
  TOP w0.127: U6.18 37.41,35.56 39.12,37.27 39.12,37.31 39.24,37.44 39.24,38.94 39.24,38.96 39.24,44.04 39.12,44.16 37.98,45.3 v1(37.98,46.35) ; J4.5 47.76,57.15 v1(48.9,58.29)
  BOTTOM w0.127: v1(48.9,58.29) 47.82,57.21 39.18,57.21 37.98,56.02 v1(37.98,46.35)
LCD_D19: length 38.5
  TOP w0.127: U6.19 37.01,35.56 38.99,37.54 38.99,38.95 38.99,38.97 38.99,38.98 38.99,43.89 37.09,45.78 v1(37.09,46.35) ; J4.6 47.26,57.8 v1(47.75,58.29)
  BOTTOM w0.127: v1(47.75,58.29) 47.12,57.66 39.24,57.66 37.09,55.51 v1(37.09,46.35)
LCD_D20: length 36.3
  TOP w0.127: U6.21 v1(36.2,46.35) ; J4.7 46.76,54.78 46.74,54.8 v1(46.74,58.29)
  BOTTOM w0.127: v1(46.74,58.29) 39.5,58.29 36.2,55 v1(36.2,46.35)
LCD_D21: length 38.2
  TOP w0.127: v1(46.61,48.51) 47.5,49.4 47.5,51.05 46.26,52.3 J4.8 ; v1(35.43,42.91) 33.78,41.26 33.78,34.8 34.41,34.17 U6.23
  BOTTOM w0.127: v1(35.43,42.91) 35.45,42.91 35.81,42.55 47.54,42.55 49.66,44.66 49.66,47.54 48.68,48.51 v1(46.61,48.51)
LCD_D22: length 39.7
  TOP w0.127: U6.24 34.3,33.77 33.53,34.54 33.53,41.9 v1(34.54,42.91) ; v1(46.61,49.4) 47.18,49.97 47.18,50.99 45.76,52.42 J4.9
  BOTTOM w0.127: v1(34.54,42.91) 35.16,42.29 47.65,42.29 49.91,44.56 49.91,47.65 48.15,49.4 v1(46.61,49.4)
LCD_D23: length 41.4
  TOP w0.127: v1(33.65,42.91) 33.65,42.54 33.27,42.16 33.27,34.42 34.32,33.37 U6.25 ; v1(46.61,50.29) 45.72,50.29 45.26,50.76 J4.10
  BOTTOM w0.127: v1(46.61,50.29) 47.62,50.29 50.16,47.75 50.16,44.45 47.75,42.04 34.53,42.04 v1(33.65,42.91)
LCD_DE: length 27.3
  TOP w0.127: v1(33.91,55.24) 33.76,55.09 J4.33 ; U6.27 34.36,32.57 32.77,34.16 32.77,51.03 34.31,52.58 v1(34.8,52.58)
  BOTTOM w0.127: v1(34.8,52.58) 34.8,55.12 34.67,55.24 v1(33.91,55.24)
LCD_HSYNC: length 24.1
  TOP w0.127: J4.31 34.76,53.38 32.51,51.14 32.51,34.04 34.38,32.17 U6.28
LCD_REST: length 47.3
  TOP w0.127: v1(27.69,54.61) 28.33,53.97 J4.40 ; U6.45 35.81,24.38 35.68,24.26 33.15,24.26 30.99,22.1 30.99,20.83 30.86,20.7 29.08,20.7 v1(28.96,20.83)
  BOTTOM w0.127: v1(28.96,20.83) 29.4,21.27 29.4,42.86 27.69,44.58 v1(27.69,54.61)
LCD_VSYNC: length 24.5
  TOP w0.127: J4.32 34.26,53.31 32.26,51.31 32.26,33.91 34.39,31.77 U6.29
SDIO_CLK: length 20.5
  TOP w0.127: v1(41.95,14.31) 42.76,15.11 45.47,15.11 46.74,16.38 46.74,21.46 46.48,21.72 42.99,21.72 42.8,21.72 40.2,24.31 U6.56
  BOTTOM w0.127: U10.5 v1(41.95,14.31)
SDIO_CMD: length 23.2
  TOP w0.127: 46.35,17.29 46.35,16.38 45.34,15.37 40.78,15.37 v1(39.76,14.35) ; 46.35,17.29 46.35,21.21 46.1,21.46 42.67,21.46 39.81,24.33 U6.55 ; 46.35,17.29 46.09,17.03 R24.2
  BOTTOM w0.127: U10.3 v1(39.76,14.35)
SDIO_D0: length 23
  TOP w0.127: 48.64,17.29 48.64,15.88 47.62,14.86 44.96,14.86 v1(44.16,14.06) ; 48.64,17.29 48.64,21.72 48.39,21.97 46.59,21.97 46.59,21.97 42.93,21.97 40.6,24.29 U6.57 ; 48.64,17.29 48.37,17.03 R25.2
  BOTTOM w0.127: U10.7 v1(44.16,14.06)
SDIO_D1: length 25.4
  TOP w0.127: R26.2 50.17,17.03 50.42,17.27 ; 50.42,17.27 50.42,21.97 50.16,22.23 43.2,22.23 43.05,22.23 41,24.27 U6.58 ; 50.42,17.27 50.42,15.62 49.4,14.61 45.81,14.61 v1(45.26,14.05)
  BOTTOM w0.127: U10.8 v1(45.26,14.05)
SDIO_D2: length 18.7
  TOP w0.127: 42.8,17.4 42.8,16.64 42.04,15.88 39.12,15.88 v1(37.56,14.31) ; 42.8,17.4 42.43,17.03 R22.2 ; 42.8,17.4 42.8,20.83 42.67,20.96 42.42,20.96 39.01,24.37 U6.53
  BOTTOM w0.127: U10.1 v1(37.56,14.31)
SDIO_D3: length 20.9
  TOP w0.127: 44.58,17.29 44.58,16.64 43.56,15.62 39.97,15.62 v1(38.65,14.3) ; 44.58,17.29 44.58,21.08 44.45,21.21 42.78,21.21 42.54,21.21 39.41,24.35 U6.54 ; 44.58,17.29 44.31,17.03 R23.2
  BOTTOM w0.127: U10.2 v1(38.65,14.3)
SOC_USB_DM: length 27
  TOP w0.127: U6.68 45.25,26.17 45.36,26.28 45.9,26.28 46.27,25.91 49.81,25.91 50.82,24.89 52.73,24.89 54.86,22.75 54.86,17.67 55.65,16.89 60.87,16.89 61.1,16.66 61.1,13.95 USB2.2
SOC_USB_DP: length 27.4
  TOP w0.127: USB2.3 61.36,13.95 61.36,16.76 60.98,17.14 55.75,17.14 55.12,17.78 55.12,22.86 52.83,25.15 50.93,25.15 49.91,26.16 46.38,26.16 46,26.54 45.25,26.54 45.22,26.57 U6.69
SPI0_CLK: length 54.9
  TOP w0.127: U9.30 68.7,22.21 71.45,24.96 73.34,24.96 v1(73.91,24.38) ; v1(54.1,14.99) 53.53,14.99 50.74,17.78 50.74,22.03 50.29,22.48 43.18,22.48 41.41,24.25 U6.59
  BOTTOM w0.127: v1(73.91,24.38) 73.91,18.2 70.7,14.99 v1(54.1,14.99)
SPI0_CS: length 53.4
  TOP w0.127: v1(72.14,25.53) 71.41,25.53 67.44,21.55 U9.29 ; v1(54.1,15.88) 53.53,15.88 50.99,18.41 50.99,22.16 50.42,22.73 43.31,22.73 41.81,24.23 U6.60
  BOTTOM w0.127: v1(72.14,25.53) 72.9,25.53 73.03,25.4 73.03,18.57 70.33,15.88 v1(54.1,15.88)
SPI0_MISO: length 46.3
  TOP w0.127: U6.61 42.2,24.22 43.43,22.99 50.53,22.99 51.25,22.27 51.25,19.05 53.53,16.76 v1(54.1,16.76) ; U9.31 69.97,22.22 v1(72.14,24.38)
  BOTTOM w0.127: v1(72.14,24.38) 72.14,18.94 69.96,16.76 v1(54.1,16.76)
SPI0_MOSI: length 52.5
  TOP w0.127: U9.37 77.59,22.21 77.6,22.22 v1(77.6,25.78) ; v1(54.1,17.65) 53.53,17.65 51.5,19.68 51.5,22.37 50.63,23.24 43.56,23.24 42.6,24.2 U6.62
  BOTTOM w0.127: v1(77.6,25.78) 77.19,26.19 71.37,26.19 71.25,26.06 71.25,19.3 69.6,17.65 v1(54.1,17.65)
SPI1_CLK: length 66.5
  TOP w0.127: v2(35.96,26.95) 35.96,27.28 35.87,27.37 U6.40
  BOTTOM w0.127: v2(35.96,26.95) 36.46,26.95 36.74,26.67 39.69,26.67 42.48,23.88 53.66,23.88 54.48,24.7 54.48,48.7 56.58,50.8 62.63,50.8 63.25,51.41 63.25,56.26 62.48,57.02 59.44,57.02 J5.2
SPI1_CS: length 68.1
  TOP w0.127: v1(33.78,25.15) 34.29,25.65 34.29,26.45 34.41,26.57 U6.42
  BOTTOM w0.127: v1(33.78,25.15) 33.78,24.51 33.91,24.38 35.31,24.38 37.08,26.16 39.48,26.16 42.27,23.37 53.87,23.37 54.99,24.49 54.99,48.49 56.79,50.29 62.87,50.29 63.75,51.18 63.75,56.52 62.99,57.28 J5.4
SPI1_MISO: length 67
  TOP w0.127: U6.39 35.77,27.77 35.94,27.94 v2(35.94,28.32)
  BOTTOM w0.127: J5.3 61.72,57.28 62.61,57.28 63.5,56.39 63.5,51.31 62.74,50.55 56.69,50.55 54.74,48.6 54.74,24.59 53.76,23.62 42.37,23.62 39.58,26.42 35.79,26.42 35.47,26.74 35.47,27.85 v2(35.94,28.32)
SPI1_MOSI: length 70.7
  TOP w0.127: U6.41 33.64,26.97 33.53,26.86 v1(33.53,26.29)
  BOTTOM w0.127: J5.5 64.01,57.02 64.01,51.05 62.99,50.04 56.9,50.04 55.24,48.39 55.24,24.38 53.98,23.11 42.16,23.11 39.37,25.91 37.21,25.91 35.43,24.13 33.78,24.13 33.02,24.89 33.02,25.78 v1(33.53,26.29)
TCK: length 35.1
  TOP w0.127: v1(61.34,48.01) 59.82,48.01 57.91,46.1 57.91,36.1 59.59,34.42 U9.16
  BOTTOM w0.127: J3.2 v1(61.34,48.01)
TDI: length 24.9
  TOP w0.127: J3.1 67.31,50.55 62.36,45.59 U9.14
TDO: length 41.7
  TOP w0.127: v1(57.53,25.53) U9.23
  BOTTOM w0.127: J3.4 57.66,42.93 57.53,42.8 v1(57.53,25.53)
TMS: length 20.8
  TOP w0.127: J3.3 64.77,45.47 63.63,44.32 U9.13
UART1_RX: length 65.2
  TOP w0.127: v1(54.1,20.32) 53.47,20.32 52.32,21.46 52.32,22.63 50.95,24 47.81,24 43.93,24 43.81,24.13 U6.65 ; v1(59.44,41.53) v1(59.44,45.47)
  BOTTOM w0.127: v1(59.44,41.53) 59.44,21.98 57.77,20.32 v1(54.1,20.32) ; J5.7 70.61,51.32 68.19,48.9 60.31,48.9 59.44,48.02 v1(59.44,45.47)
UART1_TX: length 62.8
  TOP w0.127: v1(54.1,21.21) 53.53,21.21 52.58,22.16 52.58,22.73 51.05,24.26 47.92,24.26 47.92,24.26 44.33,24.26 44.2,24.38 U6.66 ; v1(58.55,41.53) v1(58.55,45.47)
  BOTTOM w0.127: v1(54.1,21.21) 57.4,21.21 58.55,22.35 v1(58.55,41.53) ; J5.6 69.22,57.4 69.22,51.18 67.82,49.78 59.94,49.78 58.55,48.39 v1(58.55,45.47)
USB_DN: length 23
  TOP w0.203: U11.A7 13.08,6.5 13.02,6.44 ; 13.02,6.44 13.09,6.36 13.45,6.36 v1(13.84,5.97) ; 13.02,6.44 13.02,4.66 13.28,4.39 24.93,4.39 25.36,4.83 25.36,6.51 24.89,6.98 U5.6 ; U11.B7 v1(12.08,6.36)
  BOTTOM w0.203: v1(12.08,6.36) 13.45,6.36 v1(13.84,5.97)
USB_DP: length 22.5
  TOP w0.203: U5.5 26.16,6.98 25.69,6.51 25.69,4.69 25.07,4.06 13.15,4.06 12.69,4.52 12.69,6.61 12.58,6.72 U11.A6 12.7,7.62 12.7,8.24 12.83,8.37 13.32,8.37 13.46,8.24 13.46,7.62 U11.B6
USB_RXD: length 23.8
  TOP w0.127: U5.3 28.7,10.16 28.96,10.41 32.38,10.41 32.51,10.54 32.51,22.33 33.68,23.5 36.2,23.5 37.01,24.31 U6.48
USB_TXD: length 22.8
  TOP w0.127: U5.2 29.97,9.78 30.35,10.16 32.64,10.16 32.77,10.29 32.77,22.23 33.78,23.24 36.32,23.24 37.41,24.32 U6.49
WIFI_EN: length 11.6
  TOP w0.127: WIFI EN.2 R16.2 71.18,43.49 C68.2 71.18,40.96 71.63,40.51 76.02,40.51 76.32,40.21 U9.3
N89821: length 4.3
  TOP w0.203: U7.14 7.69,18.52 6.85,17.68 R4.1
N90879: length 11.3
  TOP w0.203: R7.1 R6.1 22.19,20.07 22.14,20.13 C43.2 21.41,20.13 20.21,18.92 U7.3
N91416: length 11
  TOP w0.203: R9.1 R8.1 22.19,18.15 22.14,18.1 C45.2 20.78,18.1 20.36,18.52 U7.2
N96693: length 18.3
  TOP w0.127: U6.33 32.65,30.17 32.32,29.84 v1(31.75,29.84)
  POWER w0.762: v1(31.75,29.84) 31.75,31.88 26.8,36.83 v1(20.95,36.83)
N99176: length 8.4
  TOP w0.127: R14.2 52.34,31.36 52.26,31.43 C60.1 49.85,31.43 49.4,31.88 46.48,31.88 45.98,31.37 U6.81
N99180: length 8.4
  TOP w0.127: U6.83 49.63,32.17 50.67,33.21 C59.2 51.95,33.21 52.02,33.28 R13.1
N102537: length 8.9
  TOP w0.127: U6.47 36.6,24.38 35.97,23.75 33.53,23.75 31.89,22.11 R39.2 31.89,20.41 31.62,20.14 R40.2
N104315: length 8.1
  TOP w0.203: Y2.1 36.85,18.3 37.71,19.17 37.71,21.23 37.15,21.79 C62.2 37.15,22.52 37.36,22.73 37.85,22.73 38.2,23.09 U6.51
N104352: length 5.1
  TOP w0.203: Y2.3 38.95,20.88 38.92,20.9 C63.1 38.92,22.52 38.6,22.84 U6.52
N107401: length 11.6
  TOP w0.127: U9.35 75.05,13.21 75.82,12.45 J1.2
N107405: length 15.2
  TOP w0.127: J1.1 74.93,9.91 73.78,11.05 U9.34
N125505: length 11.4
  TOP w0.127: C72.1 52.26,26.16 52.08,26.35 C74.2 51.12,26.35 50.67,26.8 50.67,28.96 49.78,29.84 49.04,29.84 49.04,29.84 46.48,29.84 45.97,29.34 45.97,29.08 45.86,28.97 U6.75
N125515: length 10.3
  TOP w0.127: C73.1 52.26,27.94 52.08,27.75 C74.1 51.44,28.7 50.04,30.1 48.94,30.1 48.93,30.09 46.57,30.09 46.57,30.1 45.97,30.1 45.85,29.97 45.85,29.62 45.6,29.37 U6.76
N192994: length 6.1
  TOP w0.254: U11.B5 14.58,6 15.24,5.33 R1.2
N192998: length 6.3
  TOP w0.254: R2.2 10.15,5.33 11.58,6.76 U11.A5
N861690: length 7.4
  TOP w0.254: R3.1 12.83,26.8 12.32,26.29 U7.8
N1057780: length 15.1
  TOP w0.127: U6.70 45.93,26.97 46.48,26.42 49,26.42 50.04,26.42 51.05,25.4 53.72,25.4 53.85,25.53 53.85,28.93 54.76,29.84 RES.1
N1197170: length 1.7
  TOP w0.127: D1.2 8.39,57.9 8.39,57.9 R31.1
N8716712: length 5.4
  TOP w0.254: U7.18 12.32,12.7 11.81,12.19 R33.1
N8716719: length 7.4
  TOP w0.254: R32.1 11.3,26.91 11.92,26.29 U7.9
N10697224: length 29.5
  TOP w0.127: U9.25 62.36,17.65 63.12,16.89 71.88,16.89 72.9,15.88 72.9,3.68 J2.2
N10697227: length 2.2
  TOP w0.127: U9.28 66.17,19.43 66.16,19.42 R17.2

## Copper pours and planes (outline as drawn; the poured copper is in the pictures)
GND on TOP: 0,58.73 0.37,59.63 1.27,60 78.73,60 79.63,59.63 80,58.73 80,1.27 79.63,0.37 78.73,0 1.27,0 0.37,0.37 0,1.27 ; 40 cut-outs
GND on TOP: 26.54,26.04 26.92,26.42 29.34,26.42 29.46,26.29 29.46,24.51 29.34,24.38 25.53,24.38 25.15,24.77 25.15,25.91 25.27,26.04
GND on TOP: 75.18,43.69 75.31,43.56 75.31,40.89 75.18,40.77 72.14,40.77 72.01,40.89 72.01,42.67 72.14,42.8 73.15,42.8 73.41,43.05 73.41,43.56 73.53,43.69
GND on BOTTOM: 0,58.73 0.37,59.63 1.27,60 78.73,60 79.63,59.63 80,58.73 80,1.27 79.63,0.37 78.73,0 1.27,0 0.37,0.37 0,1.27 ; 16 cut-outs
GND on GND: 0,58.73 0.37,59.63 1.27,60 78.73,60 79.63,59.63 80,58.73 80,1.27 79.63,0.37 78.73,0 1.27,0 0.37,0.37 0,1.27
GND on POWER: 40.51,22.73 40.51,16.64 35.56,16.64 35.56,22.61 36.58,22.61 37.97,24 37.97,24.38 38.1,24.51 38.73,24.51
VBUS on TOP: 15.62,6.86 15.62,8.51 16,8.89 16,9.65 16.89,10.54 16.89,11.3 16.76,11.43 14.99,11.43 14.86,11.3 14.86,6.86
VBUS on TOP: 11.67,25.8 10.54,26.92 10.54,28.19 10.67,28.32 13.34,28.32 13.59,28.07 13.59,26.67 12.57,25.65 12.57,20.07 12.83,20.07 12.83,25.15 15.11,27.43 15.11,28.45 15.24,28.57 15.75,28.57 15.88,28.7 15.88,34.16 15.62,34.42 8.76,34.42 8.51,34.67 8.51,35.81 8.38,35.94 6.22,35.94 6.1,35.81 6.1,30.99 6.22,30.86 8.13,30.86 8.26,30.73 8.26,28.7 8.38,28.57 8.89,28.57 9.02,28.45 9.02,27.56 11.3,25.27 11.3,20.07 11.61,20.07 11.67,20.12
VBUS on TOP: 12.83,17.78 12.83,13.84 13.46,13.21 13.46,10.54 13.08,10.16 13.08,8.89 12.95,8.76 10.92,8.76 10.79,8.64 10.79,6.86 10.16,6.86 10.16,8.38 10.03,8.51 9.53,8.51 9.27,8.76 9.27,10.67 9.14,10.79 8.26,10.79 8.13,10.92 8.13,12.95 8.38,13.21 9.4,13.21 9.65,13.46 9.65,14.99 9.78,15.11 10.16,15.11 10.29,15.24 10.29,16.76 10.41,16.89 11.05,16.89 11.43,17.27 11.43,17.78 11.68,17.78 11.68,16.89 11.81,16.89 12.06,16.64 12.06,13.34 11.56,12.83 11.18,12.83 11.18,11.68 11.3,11.56 12.32,11.56 12.57,11.81 12.57,17.78
VBUS on TOP: 49.15,54.61 49.15,51.18 49.53,50.8 50.04,50.8 50.42,51.18 50.42,54.36 50.04,54.74 49.28,54.74
VBUS on POWER: 7.24,35.18 7.24,10.03 7.62,9.65 16.64,9.65 17.4,10.41 17.4,34.8 16.76,35.43 7.49,35.43
VCC_1V2 on TOP: 18.67,18.03 18.92,18.29 20.19,18.29 21.21,17.27 23.75,17.27 23.88,17.14 23.88,11.3 23.5,10.92 18.8,10.92 18.67,11.05
VCC_1V2 on TOP: 35.43,29.21 33.15,29.21 30.48,26.54 26.8,26.54 26.42,26.16 25.15,26.16 25.02,26.04 25.02,24.64 25.4,24.26 29.34,24.26 29.46,24.13 29.46,23.37 29.34,23.24 24.26,23.24 24.13,23.37 24.13,26.8 24.77,27.43 30.99,27.43 33.02,29.46 35.43,29.46
VCC_1V2 on POWER: 30.99,27.43 34.29,30.73 34.29,38.86 34.54,39.12 36.07,39.12 36.2,38.99 36.2,30.35 37.97,28.57 48.64,28.57 48.77,28.45 48.77,26.16 48.64,26.03 31.62,26.03 28.7,23.11 28.7,14.22 28.07,13.59 20.95,13.59 20.7,13.84 20.7,27.3 20.83,27.43
VCC_2V5 on TOP: 18.67,35.05 31.11,35.05 31.24,34.92 31.24,31.88 31.62,31.5 35.43,31.5 35.43,31.24 33.4,31.24 33.4,31.11 35.43,31.11 35.43,30.86 33.4,30.86 33.4,30.73 35.43,30.73 35.43,29.59 32.89,29.59 30.86,27.56 24.64,27.56 24,26.92 24,23.24 24.13,23.11 29.46,23.11 29.59,23.24 29.59,26.29 29.72,26.42 30.61,26.42 33.27,29.08 35.43,29.08 35.43,28.83 34.42,28.83 30.73,25.15 30.73,22.35 30.61,22.23 24.13,22.23 24,22.1 24,20.95 23.88,20.83 20.7,20.83 20.32,20.45 20.32,19.56 19.94,19.18 18.67,19.18 18.54,19.3 18.54,34.92 ; 1 cut-out
VCC_2V8 on TOP: 4.19,37.08 6.6,37.08 6.73,37.21 6.73,42.42 6.6,42.55 4.19,42.55 4.06,42.42 4.06,37.21
VCC_3V3 on TOP: 44.58,24.89 44.96,24.51 47.5,24.51 47.5,25.15 47.12,25.53 45.85,25.53 45.47,25.91 44.58,25.91
VCC_3V3 on TOP: 5.21,27.05 5.33,26.92 5.33,20.07 5.46,19.94 5.84,19.94 6.1,19.68 6.1,16.89 5.97,16.76 2.16,16.76 2.03,16.89 2.03,26.92 2.16,27.05
VCC_3V3 on TOP: 37.72,25.4 37.72,24.26 36.58,23.11 33.91,23.11 32.89,22.1 32.89,19.43 33.02,19.3 34.67,19.3 34.8,19.43 34.8,22.35 35.18,22.73 36.45,22.73 37.85,24.13 37.85,25.27
VCC_3V3 on TOP: 73.28,43.05 73.28,44.07 73.41,44.2 75.31,44.2 75.44,44.07 75.44,41.27 75.69,41.02 76.83,41.02 76.96,40.89 76.96,37.85 77.09,37.72 78.11,37.72 78.23,37.85 78.23,41.4 76.45,43.18 76.45,44.7 76.33,44.83 72.26,44.83 72.14,44.7 72.14,43.18 72.26,43.05
VCC_3V3 on POWER: 1.02,58.73 1.09,58.91 1.27,58.98 78.73,58.98 78.91,58.91 78.98,58.73 78.98,1.27 78.91,1.09 78.73,1.02 1.27,1.02 1.09,1.09 1.02,1.27
N89821 on TOP: 6.48,15.49 6.35,15.62 6.35,19.94 6.48,20.07 7.49,20.07 8.76,18.8 8.76,18.29 7.62,17.14 7.62,15.62 7.49,15.49
N90879 on TOP: 25.4,19.43 25.4,20.45 25.27,20.57 20.95,20.57 20.57,20.19 20.57,19.43 20.7,19.3 25.27,19.3
N91416 on TOP: 25.4,17.53 25.4,18.8 25.27,18.92 20.57,18.92 20.32,18.67 20.32,18.41 21.34,17.4 25.27,17.4
N96693 on TOP: 19.56,38.35 19.43,38.23 19.43,35.69 19.56,35.56 22.61,35.56 22.73,35.69 22.73,38.23 22.61,38.35
N871675 on TOP: 11.18,19.56 11.18,25.15 9.53,26.8 7.87,26.8 7.75,26.67 7.75,22.23 10.41,19.56
N8716714 on TOP: 12.95,17.78 12.95,13.97 15.24,11.68 16.76,11.68 16.89,11.81 16.89,14.22 13.34,17.78
N8716716 on TOP: 12.95,20.19 12.95,25.02 14.86,26.92 16.38,26.92 16.51,26.8 16.51,22.35 14.35,20.19

## Text on the board
USER_PART_NUM_TOP: FIGURE | FINISHED_SIZE | 12.0 | 16.0 | 35.402x35.402 | 43.299x43.299 | 47.201x47.201 | 55.098x27.598 | 66.902x27.598 | 82.701x82.701 | 126.0x126.0 | DRILL CHART: TOP to BOTTOM | ALL UNITS ARE IN MILS | ROTATION | - | 0.000 | 90.000 | PLATED | QTY | 4 | 566 | 8 | 2
